# EAGLE board Logic Engine v0.31 (EAGLE 6.5.0)
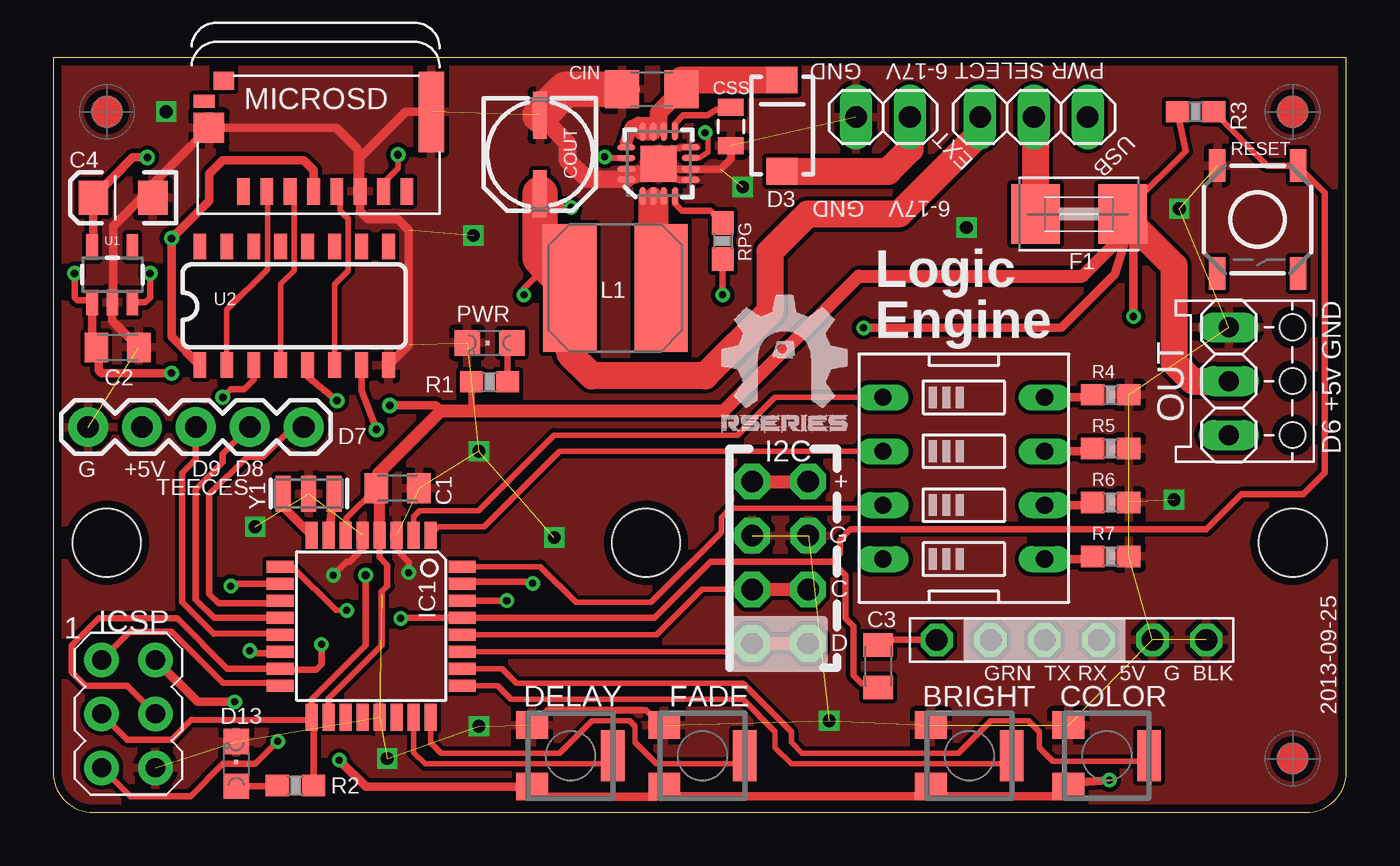
[diagram p0: board, top side]
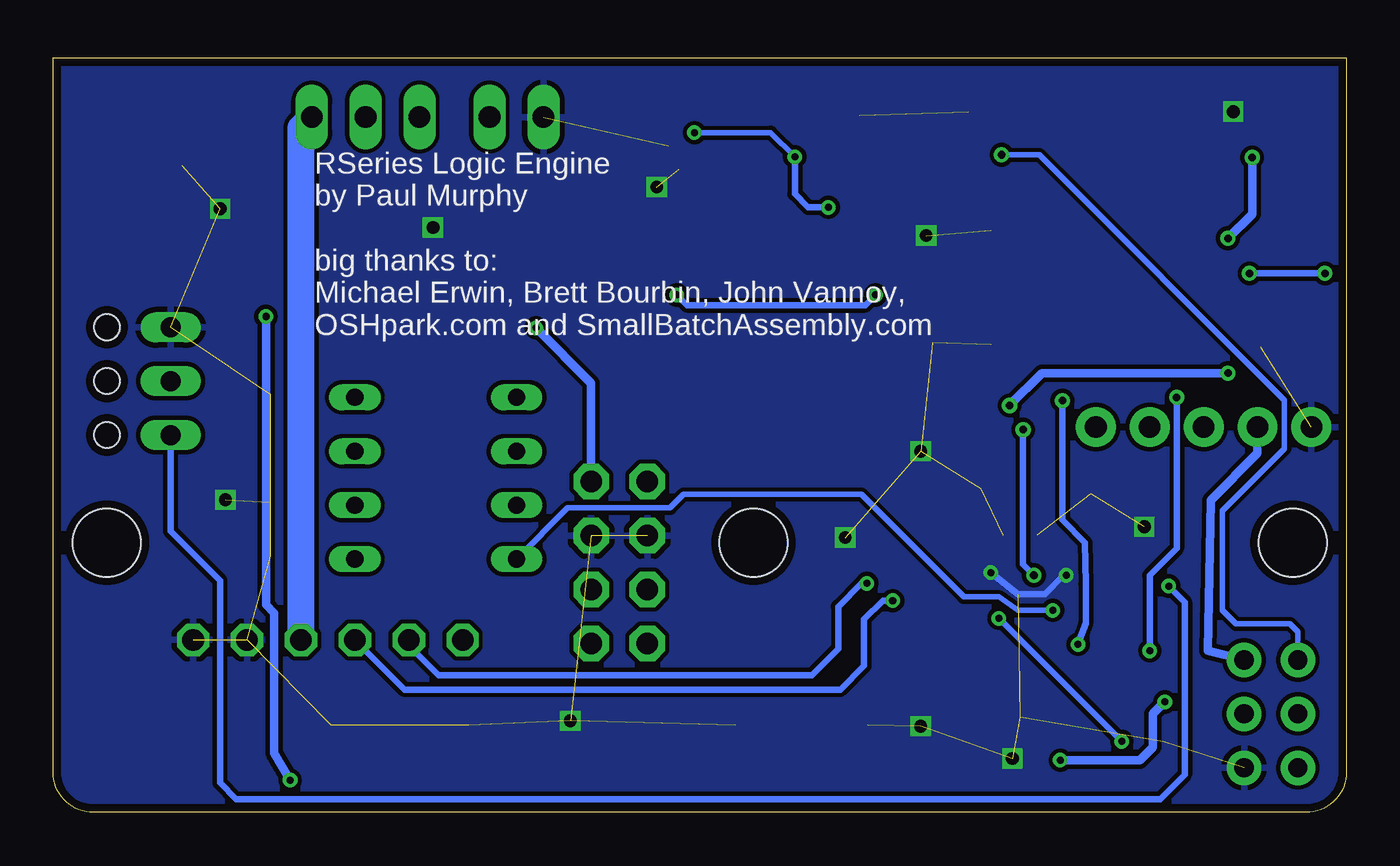
[diagram p1: board, bottom side, seen from below]

Size 60.96 x 35.56 mm. Coordinates in mm from the lower left corner, seen from the top.
Outline: 0,35.56 0,1.91 arc90 1.91,0 59.05,0 arc90 60.96,1.91 60.96,35.56 0,35.56
Copper layers (1*16): Top 0.0356mm / dielectric 1.5011mm / Bottom 0.0356mm
Design rules "LaenPCBOrder *": minimum track width 10mil, minimum drill 13mil, track to track 6mil, track to pad 6mil, pad to pad 6mil, via to via 12mil, smd to smd 6mil, copper to edge 15mil, drill to drill 6mil, minimum pad ring 7mil, minimum via ring 7mil, stop-mask expansion 4mil, vias tented up to drill 14mil, thermal gap 10mil
Net classes: 1 supply: width 0.305 mm, drill 0.152 mm, clearance 0.203 mm
Holes 3.2 mm at 58.42,12.7 2.54,12.7 27.94,12.7

## Footprints (pad centres in the part's own frame; a part is rotated, then mirrored left to right if it is on the bottom)
3364 = smd 1.3 x 1.5: 1 -1.45,-1.8; 3 1.45,-1.8 | smd 2.4 x 1.1: 2 0,2
C0805K = smd 1.1 x 1.4: 1 -1,0; 2 1,0
EIA3216 = smd 1.4 x 1.6: A 1.4,0; C -1.4,0
1206 = smd 1.6 x 1.8: 1 -1.4,0; 2 1.4,0
PANASONIC_C = smd 2.2 x 0.65: + 1.9,-0.2; - -1.8,-0.2
0805 = smd 0.8 x 1.2: 1 -0.9,0; 2 0.9,0
SMA-DIODE = smd 1.27 x 1.47: A -2.15,0; C 2.15,0
CHIPLED_0805 = smd 1.2 x 1.2: A 0,-1.05; C 0,1.05
1X02 = drill 1.016 long: 1 -1.27,0; 2 1.27,0
1812 = smd 2.286 x 2.794: 1 -2.046,0; 2 2.046,0
1X06-CLEAN = drill 1.016 octagon: 1 -6.35,0; 2 -3.81,0; 3 -1.27,0; 4 1.27,0; 5 3.81,0; 6 6.35,0
1X04-CB = drill 1.016 pad 1.676 octagon: 1 -3.81,0; 2 -1.27,0; 3 1.27,0; 4 3.81,0
TQFP32-08 = smd 1.27 x 0.559: 1 -4.293,2.8; 2 -4.293,2; 3 -4.293,1.2; 4 -4.293,0.4; 5 -4.293,-0.4; 6 -4.293,-1.2; 7 -4.293,-2; 8 -4.293,-2.8; 17 4.293,-2.8; 18 4.293,-2; 19 4.293,-1.2; 20 4.293,-0.4; 21 4.293,0.4; 22 4.293,1.2; 23 4.293,2; 24 4.293,2.8 | smd 0.559 x 1.27: 9 -2.8,-4.293; 10 -2,-4.293; 11 -1.2,-4.293; 12 -0.4,-4.293; 13 0.4,-4.293; 14 1.2,-4.293; 15 2,-4.293; 16 2.8,-4.293; 25 2.8,4.293; 26 2,4.293; 27 1.2,4.293; 28 0.4,4.293; 29 -0.4,4.293; 30 -1.2,4.293; 31 -2,4.293; 32 -2.8,4.293
AVRISP = drill 0.9 pad 1.626: 1 -1.27,2.54; 2 1.27,2.54; 3 -1.27,0; 4 1.27,0; 5 -1.27,-2.54; 6 1.27,-2.54
SRN6045 = smd 2.5 x 6: 1 -2.175,-0.175; 2 2.125,-0.175
MICROSD_SMALL = smd 0.6 x 1.25: 1 3.85,-0.05; 2 2.75,-0.05; 3 1.65,-0.05; 4 0.55,-0.05; 5 -0.55,-0.05; 6 -1.65,-0.05; 7 -2.75,-0.05; 8 -3.85,-0.05 | smd 0.95 x 0.85: CD1 4.775,-5.275 | smd 1 x 0.6: CD2 5.7,-4.3 | smd 1.2 x 3.8: MT1 -5,-3.8 | smd 1.45 x 1.4: MT2 5.475,-3.05
MDF7_1X03 = drill 0.95 long: 1 -2.54,0; 2 0,0; 3 2.54,0 | hole 1.2: 0,3; 2.54,3; -2.54,3
1X03 = drill 1.016 long: 1 -2.54,0; 2 0,0; 3 2.54,0
0603-RES = smd 1.1 x 1: 1 -0.85,0; 2 0.85,0
TACTILE_SWITCH_SMD = smd 1.524 x 0.762: 1 -2.54,1.905; 2 2.54,1.905; 3 -2.54,-1.905; 4 2.54,-1.905
EDG-04 = drill 0.813 long: 1 -3.81,-3.81; 2 -1.27,-3.81; 3 1.27,-3.81; 4 3.81,-3.81; 5 3.81,3.81; 6 1.27,3.81; 7 -1.27,3.81; 8 -3.81,3.81
1X05 = drill 1.016 pad 1.88: 1 0,0; 2 2.54,0; 3 5.08,0; 4 7.62,0; 5 10.16,0
SOT23-5 = smd 0.55 x 1.2: 1 -0.95,-1.3; 2 0,-1.3; 3 0.95,-1.3; 4 0.95,1.3; 5 -0.95,1.3
SO016 = smd 0.6 x 1.2: 1 -4.445,-2.8; 2 -3.175,-2.8; 3 -1.905,-2.8; 4 -0.635,-2.8; 5 0.635,-2.8; 6 1.905,-2.8; 7 3.175,-2.8; 8 4.445,-2.8; 9 4.445,2.8; 10 3.175,2.8; 11 1.905,2.8; 12 0.635,2.8; 13 -0.635,2.8; 14 -1.905,2.8; 15 -3.175,2.8; 16 -4.445,2.8
QFN16-3X3MM_1:1_V03 = smd 0.85 x 0.28: 1 -1.524,0.75; 2 -1.524,0.253; 3 -1.529,-0.25; 4 -1.527,-0.774; 9 1.503,-0.77; 10 1.498,-0.245; 11 1.498,0.255; 12 1.495,0.755 | smd 0.28 x 0.85: 5 -0.765,-1.513; 6 -0.265,-1.513; 7 0.263,-1.513; 8 0.763,-1.513; 13 0.758,1.518; 14 0.258,1.518; 15 -0.247,1.518; 16 -0.742,1.518 | smd 1.68 x 1.68: EXT -0.009,0.008
RESONATOR-SMD = smd 0.7 x 1.7: 1 -1.2,0; 2 0,0; 3 1.2,0

## Placement (x,y rotation side)
BRIGHT  [3364]  43.18,2.67 270 top
C1  0.1uF  [C0805K]  16.24,15.28 0 top
C2  0.1uF  [C0805K]  3.05,21.91 0 top
C3  0.1uF  [C0805K]  38.89,6.89 270 top
C4  10uF  [EIA3216]  3.3,28.96 180 top
CIN  10uF  [1206]  28.23,34.07 180 top
COLOR  [3364]  49.66,2.67 270 top
COUT  22uF  [PANASONIC_C]  23.15,31.05 270 top
CSS  3.3nF  [0805]  31.95,32.32 270 top
D3  BA340LA  [SMA-DIODE]  34.36,32.36 90 top
D13  [CHIPLED_0805]  8.64,2.29 0 top
DELAY  [3364]  24.38,2.67 270 top
EXT_PWR  [1X02]  39.12,32.77 0 top
F1  [1812]  48.36,28.19 180 top
FADE  [3364]  30.61,2.67 270 top
FID4  [FIDUCIAL_G15]  2.54,33.02 0 top
FID5  [FIDUCIAL_G15]  58.42,33.02 0 top
FID6  [FIDUCIAL_G15]  58.42,2.54 0 top
FTDI  GRN TX RX 5V G BLK  [1X06-CLEAN]  48.01,8.13 180 top
I2C  [1X04-CB]  32.94,11.78 90 top
I2C1  [1X04-CB]  35.6,11.78 90 top
IC1  MEGA328P  [TQFP32-08]  14.99,8.78 270 top
ICSP  AVRISP-6  [AVRISP]  3.56,4.65 0 top
L1  2.2uH  [SRN6045]  26.48,24.54 180 top
MICROSD  MICROSD  [MICROSD_SMALL]  12.83,29.21 180 top
OUT  [MDF7_1X03]  55.42,20.32 270 top
PWR  [CHIPLED_0805]  20.57,22.12 90 top
PWR_SEL1  [1X03]  46.23,32.77 0 top
R1  1K  [0603-RES]  20.57,20.29 0 top
R2  1K  [0603-RES]  11.43,1.27 180 top
R3  10K  [0603-RES]  53.85,33.02 0 top
R4  10K  [0603-RES]  49.85,19.68 0 top
R5  10K  [0603-RES]  49.85,17.14 0 top
R6  10K  [0603-RES]  49.85,14.61 0 top
R7  10K  [0603-RES]  49.85,12.06 0 top
RESET  [TACTILE_SWITCH_SMD]  56.77,27.94 270 top
RPG  100K  [0603-RES]  31.56,26.92 270 top
SW1  [EDG-04]  42.93,15.75 270 top
TEECES  [1X05]  1.65,18.16 0 top
U1  LP2985  [SOT23-5]  2.79,25.34 0 top
U2  HEX_CONVERTER  [SO016]  11.37,23.88 0 top
U3  TPS62143  [QFN16-3X3MM_1:1_V03]  28.54,30.58 90 top
U$2  [RSERIES-OSHW-LOGO-SMALL]  31.11,24.77 270 top
Y1  16MHz  [RESONATOR-SMD]  12.05,15.02 180 top

## Library data of the parts
BRIGHT COLOR DELAY FADE MICROSD OUT U3 U$2 = rseries
C1-C3 D13 F1 ICSP PWR = adafruit
C4 = SparkFun-Capacitors; PROD_ID: CAP-00811
CIN COUT CSS = SparkFun-Capacitors
D3 = SparkFun-DiscreteSemi; PROD_ID: DIO-09886
EXT_PWR PWR_SEL1 = pinhead
FID4-FID6 = SmallBatchLibPre1
FTDI I2C I2C1 = carduino
IC1 = avr-7
L1 = SparkFun-Passives; PROD_ID: NDUC-11627
R1-R7 RPG = SparkFun-Resistors
RESET = SparkFun-Electromechanical
SW1 = special
TEECES = SparkFun-Connectors
U1 = SparkFun-PowerIC
U2 = SparkFun-DigitalIC
Y1 = SparkFun-FreqCtrl; PROD_ID: XTAL-08900

## Nets
+5V [supply]: BRIGHT.3 C1.1 C2.1 COLOR.3 DELAY.3 F1.1 FADE.3 I2C1.4 I2C.4 IC1.4 IC1.6 IC1.18 ICSP.2 OUT.2 R1.1 R3.1 TEECES.2 U1.1 U1.3
ANALOG0: DELAY.2 IC1.23
ANALOG1: FADE.2 IC1.24
ANALOG2: BRIGHT.2 IC1.25
ANALOG3: COLOR.2 IC1.26
ANALOG4: I2C1.1 I2C.1 IC1.27
ANALOG5: I2C1.2 I2C.2 IC1.28
AREF: IC1.20
DIGITAL2: IC1.32 SW1.3
DIGITAL3: IC1.1 SW1.2
DIGITAL4: IC1.2 SW1.1
DIGITAL5: IC1.9 SW1.4
DIGITAL6: IC1.10 OUT.3
DIGITAL7: IC1.11 TEECES.5
DIGITAL8: IC1.12 TEECES.4
DIGITAL9: IC1.13 TEECES.3
DIGITAL10: IC1.14 U2.3
GND [supply]: BRIGHT.1 C1.2 C2.2 C4.C CIN.2 COLOR.1 COUT.- CSS.2 D13.C DELAY.1 EXT_PWR.1 FADE.1 FTDI.1 FTDI.2 I2C1.3 I2C.3 IC1.3 IC1.5 IC1.21 ICSP.6 MICROSD.6 MICROSD.MT1 MICROSD.MT2 OUT.1 PWR.C R4.2 R5.2 R6.2 R7.2 RESET.3 TEECES.1 U1.2 U2.8 U3.5 U3.6 U3.8 U3.15 U3.16 U3.EXT Y1.2
MISO: IC1.16 ICSP.1 MICROSD.7
MOSI: IC1.15 ICSP.4 U2.5
N$1: IC1.7 Y1.1
N$2: IC1.8 Y1.3
N$3: CIN.1 D3.C U3.10 U3.11 U3.12 U3.13
N$4: D13.A R2.2
N$5 [supply]: PWR.A R1.2
N$6: COUT.+ L1.2 PWR_SEL1.1 RPG.2 U3.7 U3.14
N$7: RPG.1 U3.4
N$10: F1.2 PWR_SEL1.2
N$11: D3.A EXT_PWR.2
N$12: R4.1 SW1.8
N$13: R5.1 SW1.7
N$14: R6.1 SW1.6
N$15: R7.1 SW1.5
N$16: MICROSD.3 U2.4
N$17: MICROSD.5 U2.6
N$18: MICROSD.2 U2.2
N$20: CSS.1 U3.9
N$22: L1.1 U3.1 U3.2 U3.3
RST: C3.2 IC1.29 ICSP.5 R3.2 RESET.1
RTS#: C3.1 FTDI.6
RXD: FTDI.4 IC1.30
SCK: IC1.17 ICSP.3 R2.1 U2.7
TXD: FTDI.5 IC1.31
USB_5V [supply]: FTDI.3 PWR_SEL1.3
VDD: C4.A MICROSD.4 U1.5 U2.1

## Tracks (layer width: path | path; a pad name or v marks a point on that pad's centre or on a via)
+5V  (via drill 0.33, 0.36)
  Top 0.305: 50.93,28.7 53.38,31.15 R3.1 | R1.1 19.72,18.99 19.79,18.92 | U1.3 4.35,24.04 4.57,24.26 v4.57,25.4 | v1.02,25.4 1.02,24.26 1.14,24.13 1.75,24.13 U1.1 | IC1.18 12.99,5.37 15.49,7.87 15.49,10.41 15.75,10.67 15.75,11.66 15.39,12.02 IC1.4 15.39,12.97 | IC1.6 13.72,13.07 | 13.84,13.07 13.84,13.88 C1.1
  Top 0.406: U1.1 1.84,22.11 C2.1 2.16,21.8 2.16,20.83 2.29,20.7 v5.59,20.7 | COLOR.3 48.31,0.76 | v50.93,23.37 50.93,28.7 50.42,28.19 F1.1 | COLOR.3 48.04,1.4 v49.78,1.52 | COLOR.3 47.86,1.12 47.5,0.76 41.84,0.76 BRIGHT.3 41.38,1.02 41.12,0.76 29.26,0.76 FADE.3 28.81,1.12 28.42,0.74 23.06,0.74 DELAY.3 14.76,1.22 v13.49,2.46 | IC1.4 15.37,13.07 | 15.37,15.4 C1.1 | ICSP.2 6.8,5.21 v8.56,5.21 | v38.2,22.84 47.52,22.84 50.04,25.35 50.8,27.79 | v15.88,19.18 18.03,19.18 18.29,18.92 | 13.72,13.07 13.84,13.07
  Top 0.508: 15.39,12.97 15.39,15.28 C1.1
  Top 0.61: F1.1 50.4,27.16 48.51,25.27 37.97,25.27 31.62,18.92 19.79,18.92 18.29,18.92 15.37,16 15.37,15.4 | I2C.4 I2C1.4
  Top 1.27: F1.1 50.8,27.79 52.83,25.76 52.83,21.21 53.72,20.32 OUT.2
  Bottom 0.305: v4.57,25.4 v1.02,25.4
  Bottom 0.406: v49.78,1.52 50.55,2.79 50.55,9.4 50.93,9.78 v50.93,23.37 | v8.56,5.21 9.12,4.65 9.12,3.07 9.73,2.46 v13.49,2.46 | TEECES.2 4.19,16.92 6.4,14.71 6.53,7.62 ICSP.2 | I2C1.4 35.6,20.23 v38.2,22.84 | v5.59,20.7 14.35,20.7 v15.88,19.18
ANALOG0
  Top 0.254: 26.42,2.03 26.38,2.06 DELAY.2 26.13,2.29 17.53,2.29 16.99,2.82 IC1.23
ANALOG1
  Top 0.254: IC1.24 17.79,3.29 18.29,2.79 23.88,2.79 25.4,4.32 27.18,4.32 27.43,4.06 27.43,3.3 28.45,2.29 32.35,2.29 FADE.2
ANALOG2
  Top 0.254: IC1.25 20.95,5.98 21.59,5.33 32.51,5.33 34.04,3.81 34.04,3.05 34.8,2.29 44.93,2.29 BRIGHT.2
ANALOG3
  Top 0.254: IC1.26 21.16,6.78 21.84,6.1 32.51,6.1 34.8,3.81 34.8,3.3 35.31,2.79 42.67,2.79 44.2,4.32 45.97,4.32 46.48,3.81 46.48,3.05 47.12,2.41 51.4,2.41 COLOR.2
ANALOG4
  Top 0.254: IC1.27 32.55,7.58 I2C.1
  Top 0.61: I2C.1 I2C1.1
ANALOG5
  Top 0.254: I2C.2 30.57,10.51 28.45,8.38 IC1.28
  Top 0.61: I2C.2 I2C1.2
DIGITAL2
  Top 0.254: SW1.3 38.3,14.48 38.15,14.33 31.9,14.33 31.5,13.92 31.5,13.21 28.19,9.91 24.64,9.91 22.96,11.58 IC1.32
DIGITAL3
  Top 0.254: IC1.1 18.18,13.46 20.32,13.46 23.88,17.02 SW1.2
DIGITAL4
  Top 0.254: IC1.2 16.99,13.94 17.27,14.22 20.07,14.22 23.62,17.78 32.26,17.78 34.04,19.56 SW1.1
DIGITAL5  (via drill 0.33)
  Top 0.254: v13.84,9.53 13.34,9.53 11.28,11.58 IC1.9
  Bottom 0.254: SW1.4 36.7,14.35 31.88,14.35 31.24,14.99 22.86,14.99 18.03,10.16 16.38,10.16 15.49,9.53 v13.84,9.53
DIGITAL6  (via drill 0.33)
  Top 0.305: IC1.10 8.38,10.78 v8.38,10.67
  Bottom 0.305: v8.38,10.67 7.62,9.91 7.62,1.78 8.76,0.64 52.32,0.64 53.09,1.4 53.09,10.92 55.42,13.25 OUT.3
DIGITAL7
  Top 0.305: TEECES.5 11.3,18.16 9.91,16.76 9.14,16.76 7.37,14.99 7.37,10.29 7.8,9.85 10.23,9.85 10.29,9.91 IC1.11
DIGITAL8
  Top 0.305: TEECES.4 8,16.89 8,16.51 6.73,15.24 6.73,10.03 7.58,9.18 IC1.12
DIGITAL9
  Top 0.305: TEECES.3 6.73,16.64 6.1,16 6.1,9.91 7.57,8.43 10.21,8.43 10.26,8.38 IC1.13
DIGITAL10  (via drill 0.33, 0.36)
  Top 0.305: U2.3 9.46,20.38 9.02,19.94 8.38,19.94 v8,19.56 | v9.27,7.62 9.4,7.49 10.7,7.49 IC1.14
  Bottom 0.305: v8,19.56 8,12.45 9.27,11.18 v9.27,7.62
GND  (via drill 0.33, 0.6)  (33 unrouted)
  Top 0.305: U3.15 28.3,30.33 U3.EXT | U3.16 27.13,29.94 | 28.06,30.57 U3.EXT | 28.79,30.31 U3.EXT | U3.5 29.46,29.81 28.96,30.31 | U3.8 29.69,31.34 29.46,31.29 29.21,31.24 29.08,31.11 U3.EXT | DELAY.1 23.29,4.83 27.94,4.83 28.65,4.12 FADE.1 | IC1.5 14.59,12.43 13.97,11.81 13.84,11.81 v13.21,11.18 | v16.76,11.3 16.76,11.81 16.26,12.32 16.26,13.01 IC1.3
  Top 0.356: 27.43,29.94 28.06,30.57 | CSS.2 31.95,30.8 31.45,30.31 U3.6 28.96,30.31 28.79,30.31
  Top 0.406: C2.2 2.79,23.16 U1.2 2.85,24.09 2.85,27.61 4.64,29.4 C4.C 4.7,29.61 MICROSD.MT2 13.33,32.26 14.35,31.24 14.35,29.39 MICROSD.6 | MICROSD.6 14.48,28.32 14.86,27.94 16.26,27.94 16.76,27.43 16.76,22.03 U2.8 | MICROSD.6 14.48,30.86 16.63,33.01 MICROSD.MT1
  Top 0.61: 27.13,29.94 27.43,29.94
  Top 0.813: U3.16 25.16,29.83 24.26,30.73 24.26,31.54 COUT.-
  Top 1.676: COUT.- 24.16,34.07 CIN.2
  Bottom 0.305: v13.21,11.18 13.34,11.18 14.22,10.29 15.49,10.29 v16.76,11.3
  other vias: 20.07,17.02 23.62,12.95 52.83,14.73 32.51,29.46 19.81,27.18 53.09,28.45 15.75,2.54 20.07,4.06 36.58,4.32 9.53,13.46 43.05,27.56 5.33,33.02
  pour Bottom: -0.51,35.81 -0.51,-0.51 61.47,-0.51 61.47,36.07 -0.51,36.07
  pour Top: -1.27,36.83 -1.27,-1.27 62.23,-1.27 62.23,36.83
MISO  (via drill 0.36)
  Top 0.254: MICROSD.7 15.58,29.67 16.26,30.35 v16.26,30.99
  Top 0.305: IC1.16 10.29,5.98 10.29,6.1 7.99,6.11 5.59,8.51 3.61,8.51 ICSP.1
  Bottom 0.254: v16.26,30.99 14.48,30.99 2.92,19.43 2.92,17.14 5.84,14.22 5.84,9.6 5.84,9.53 5.21,8.89 2.67,8.89 2.29,8.51 2.29,8.38 ICSP.1
MOSI  (via drill 0.33, 0.36)
  Top 0.305: ICSP.4 3.5,5.97 1.52,5.97 0.89,6.6 0.89,7.87 2.16,9.14 5.84,9.14 8.21,6.78 IC1.15 10.75,6.73 12.39,6.73 12.65,6.99 v12.65,7.92 | U2.5 12,20.54 v13.39,19.41
  Bottom 0.305: v13.39,19.41 13.39,13.79 12.32,12.7 12.29,10.77 12.29,8.91 v12.65,7.92
N$1
  Top 0.406: Y1.1 IC1.7
N$2
  Top 0.406: Y1.3 10.85,14.41 IC1.8
N$3
  Top 0.305: U3.11 28.54,32.33 | 29.63,34.04 CIN.1 | U3.13 27.02,31.6 | U3.11 | U3.10 U3.11
  Top 0.61: 27.02,31.6 27.27,32.32 27.59,32.48 28.23,32.48 28.54,32.64
  Top 0.813: 28.54,32.33 28.54,32.64 28.54,32.96 29.63,34.04 | U3.12 U3.11
  Top 1.27: CIN.1 29.63,34.51 D3.C
N$4
  Top 0.305: R2.2 10.55,1.24 D13.A
N$5
  Top 0.305: R1.2 21.42,21.92 PWR.A
N$6  (via drill 0.33)
  Top 0.254: U3.7 30.46,30.84 30.86,31.11 30.86,31.75 v30.73,32.03
  Top 0.292: U3.14 26.26,30.83
  Top 0.305: 26.26,30.83 v26,30.89 | v24.42,28.51 23.11,28.51 22.95,28.35 | RPG.2 v31.56,24.38 | v22.19,24.38 22.19,24.7 23.28,25.79
  Top 1.27: PWR_SEL1.1 43.69,32 39.88,28.19 35.56,28.19 33.78,26.42 33.78,23.62 30.73,20.57 25.4,20.57 24.36,21.62 L1.2
  Top 1.676: COUT.+ 22.95,28.35 22.95,26.13 23.28,25.79 L1.2
  Bottom 0.254: v30.73,32.03 27.14,32.03 v26,30.89
  Bottom 0.305: v26,30.89 26,29.15 25.37,28.51 v24.42,28.51 | v31.56,24.38 31.08,23.91 22.67,23.91 v22.19,24.38
N$7
  Top 0.305: U3.4 29.32,28.69 29.65,28.35 30.98,28.35 RPG.1
N$10
  Top 1.27: PWR_SEL1.2 46.31,32.77 F1.2
N$11
  Top 1.27: D3.A 39.35,30.21 40.39,31.24 EXT_PWR.2
N$12
  Top 0.406: SW1.8 48.87,19.56 R4.1
N$13
  Top 0.406: SW1.7 48.87,17.02 R5.1
N$14
  Top 0.406: SW1.6 48.87,14.48 R6.1
N$15
  Top 0.406: SW1.5 48.87,11.94 R7.1
N$16
  Top 0.254: MICROSD.3 11.35,29.08 11.35,25.53 10.73,24.91 U2.4
N$17
  Top 0.254: MICROSD.5 13.54,29.1 13.54,28.35 13.92,27.96 13.92,25.53 13.27,24.88 U2.6
N$18
  Top 0.254: MICROSD.2 10.11,29.23 10.11,25.6 8.19,23.69 U2.2
N$20
  Top 0.305: U3.9 29.31,32.46 29.7,32.84 30.84,32.84 31.24,33.12 31.61,33.12 CSS.1
N$22
  Top 0.406: 28.29,24.72 L1.1 28.29,25.08 | 28.86,27.24 28.79,27.31 U3.3 U3.2 U3.1 27.79,27.36 27.91,27.24
  Top 0.813: U3.2 28.29,25.08
RST  (via drill 0.33)
  Top 0.305: 36.7,11.81 37.08,12.19 37.08,12.83 37.59,13.34 54.36,13.34 56.01,14.99 58.93,14.99 59.94,16 59.94,29.21 RESET.1 57.24,30.48 R3.2 | 36.7,11.81 30.99,11.81 28.36,9.18 IC1.29 16.42,9.18 v16.38,9.14 | C3.2 38.69,6.1 38.1,6.1 37.72,6.48 37.72,8.76 37.34,9.14 37.34,11.18 36.7,11.81 | ICSP.5 3.63,0.76 6.48,0.76 8,2.29 9.53,2.29 v10.59,3.35
  Bottom 0.305: v10.59,3.35 v16.38,9.14
RTS#
  Top 0.305: C3.1 39.13,8.13 FTDI.6
RXD  (via drill 0.33)
  Top 0.305: IC1.30 v21.38,9.98 v21.39,9.98
  Bottom 0.305: v21.39,9.98 21.84,9.98 22.73,9.09 22.73,6.91 23.85,5.79 44.4,5.79 FTDI.4
SCK  (via drill 0.36)
  Top 0.305: ICSP.3 3.5,3.43 5.59,3.43 6.52,4.36 11.99,4.34 12.13,4.49 IC1.17 | IC1.17 12.28,4.4 R2.1 | U2.7 14.54,19.88 v15.24,18.03 | v14.73,11.18 14.73,7.87 12.19,5.33 IC1.17
  Bottom 0.305: v15.24,18.03 15.24,11.68 v14.73,11.18
TXD  (via drill 0.33)
  Top 0.305: IC1.31 19.7,10.78 19.79,10.87 22.39,10.88 v22.61,10.79
  Bottom 0.305: v22.61,10.79 22.86,10.79 23.95,9.7 23.95,7.72 25.2,6.48 42.8,6.48 44.2,7.87 FTDI.5
USB_5V
  Bottom 1.27: FTDI.3 49.28,32.26 PWR_SEL1.3
VDD  (via drill 0.36)
  Top 0.406: U1.5 1.9,26.7 C4.A 3.74,30.86 v4.45,30.86 | U2.1 5.59,22.41 v5.59,27.05 7.37,28.83 7.37,30.1 8,30.73 11.81,30.73 12.28,30.27 MICROSD.4
  Bottom 0.406: v5.59,27.05 4.45,28.19 v4.45,30.86

## Text on the board
tPlace: GND | 6-17V | PWR SELECT | USB | EXT | GND | 6-17V | Logic / Engine | D6 +5v GND | D7 | G | +5V | D9 | D8 | + | G | C | D | 2013-09-25
bPlace: RSeries Logic Engine / by Paul Murphy / / big thanks to: / Michael Erwin, Brett Bourbin, John Vannoy, / OSHpark.com and SmallBatchAssembly.com